# Altium PCB PCB拼板.pcbdoc
Units mm, origin at the board's own origin, x right, y up, seen from the top; angles counter-clockwise.
Board outline 84.6 x 89.96 mm, 2 copper layers (Top Layer, Bottom Layer); 62 components, 70 nets, 272 pads, 115 vias.
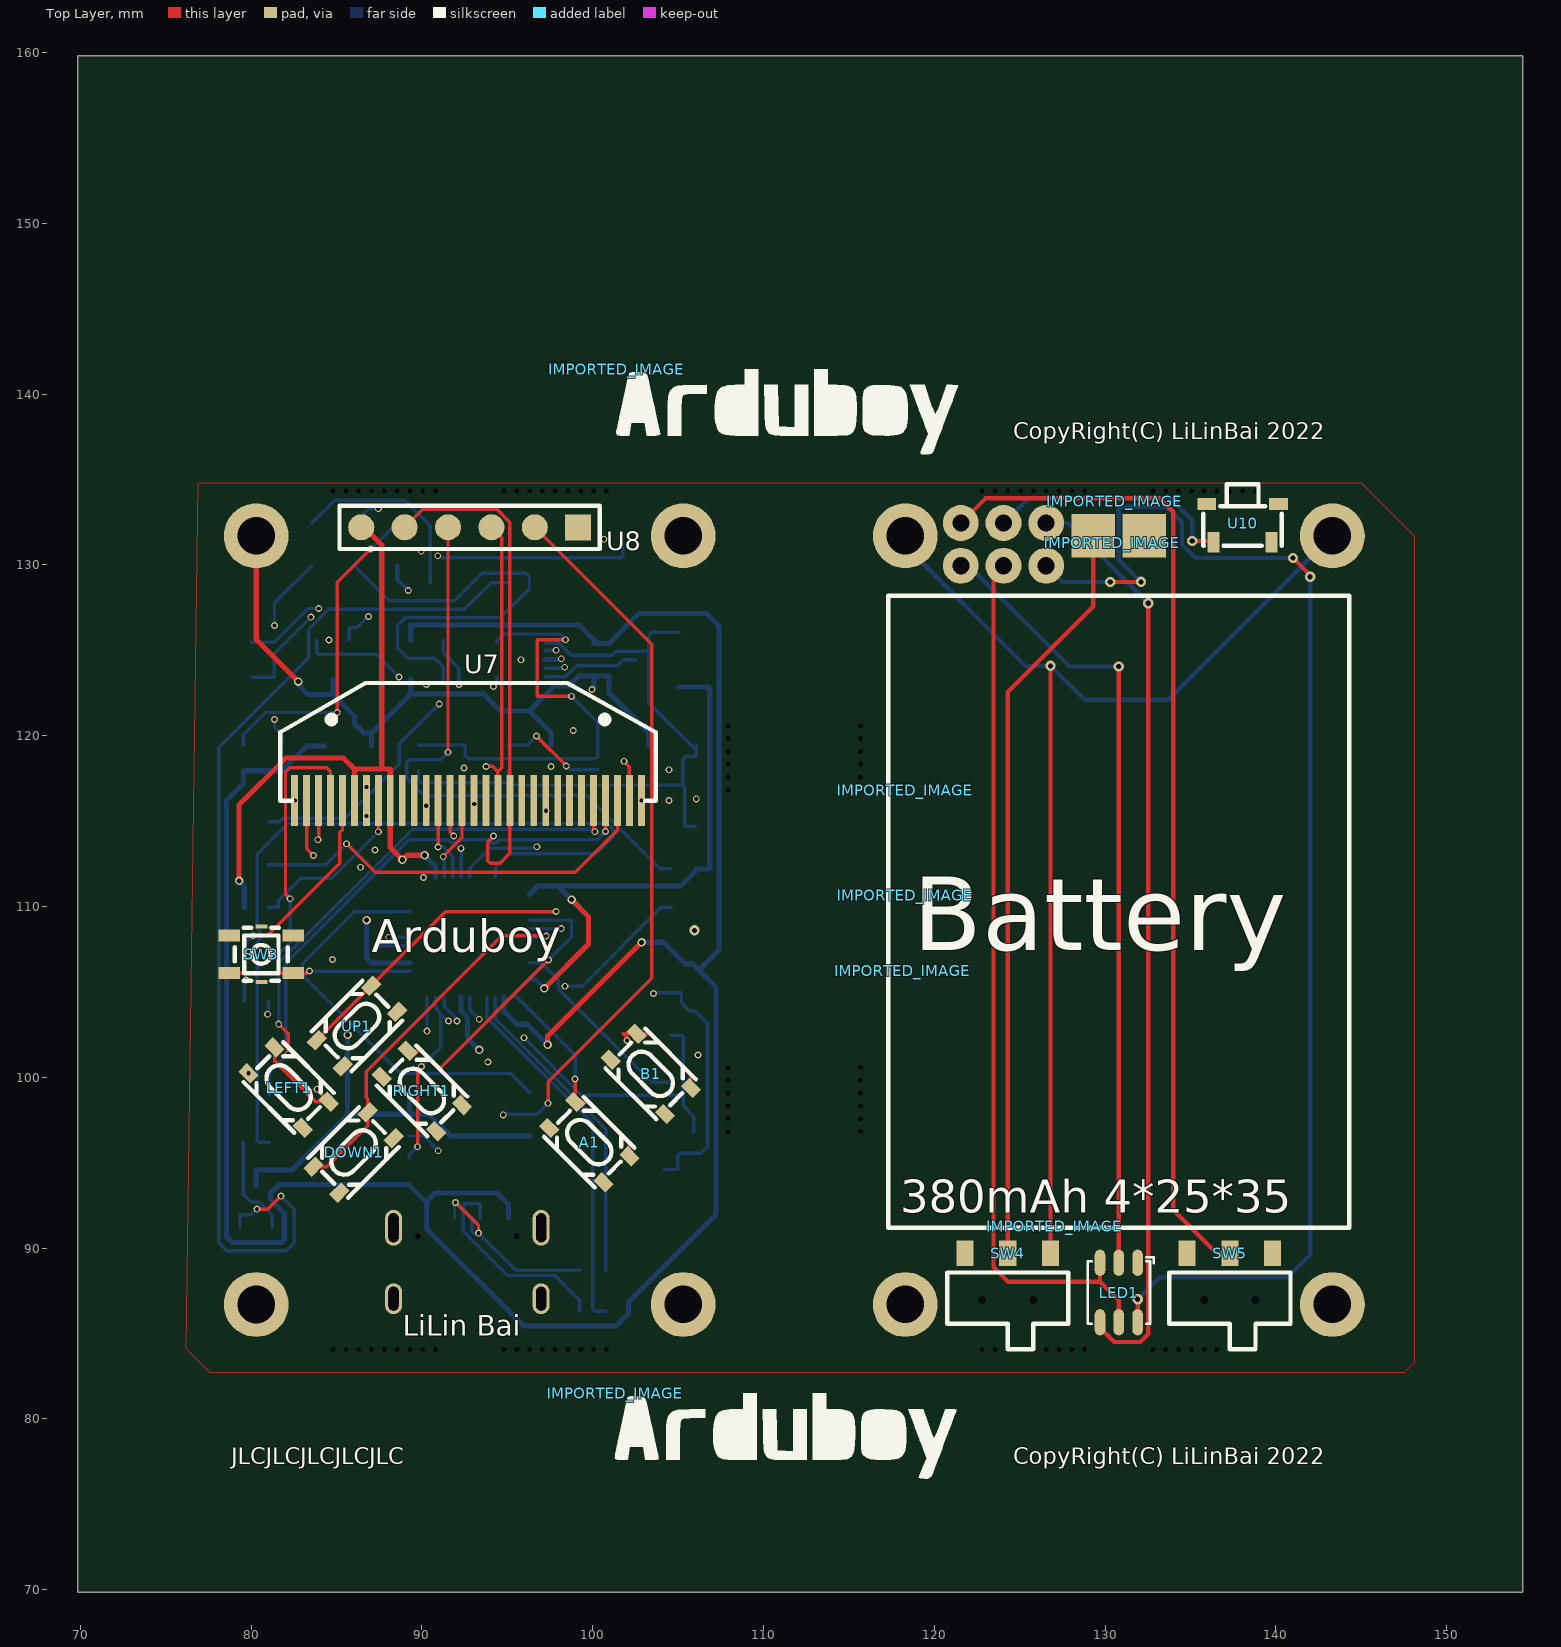
[diagram p0: Top Layer view]
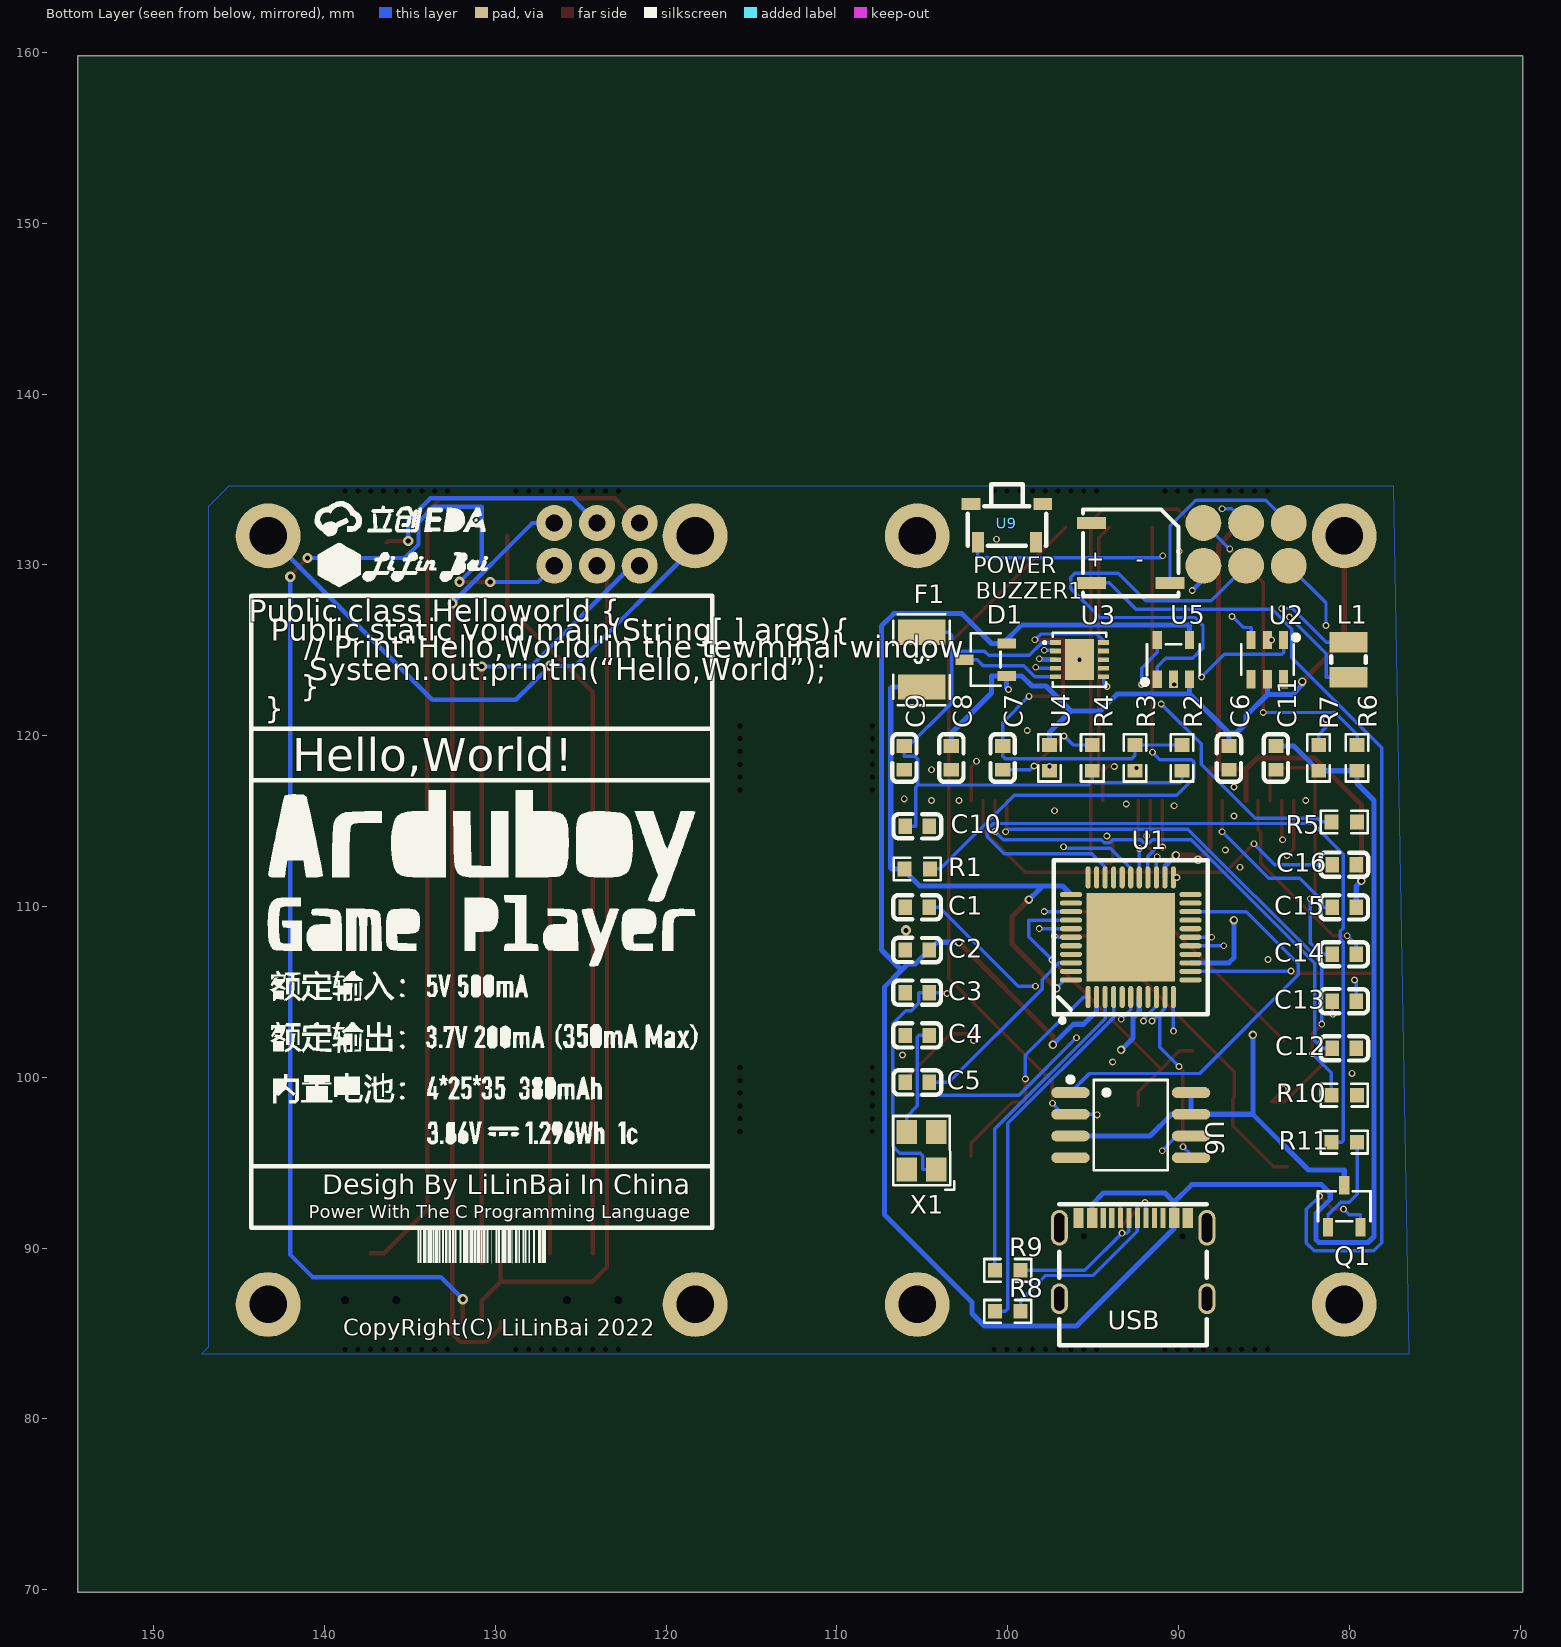
[diagram p1: Bottom Layer view, seen from below]

## Layer stack, top to bottom
Top Solder: solder mask 0.0102, Solder Resist, Dk 3.5
Top Layer: signal copper 0.0356
Dielectric 1: dielectric 0.32, FR-4, Dk 4.8
Bottom Layer: signal copper 0.0356
Bottom Solder: solder mask 0.0102, Solder Resist, Dk 3.5

## Board outline
154.45,69.85 69.85,69.85 69.85,159.808 154.45,159.808
cut-out: 84.937,134.325 ccw(c84.8,134.325) 84.662,134.325 ccw(c84.8,134.325)
cut-out: 85.688,134.325 ccw(c85.55,134.325) 85.413,134.325 ccw(c85.55,134.325)
cut-out: 86.438,134.325 ccw(c86.3,134.325) 86.163,134.325 ccw(c86.3,134.325)
cut-out: 87.187,134.325 ccw(c87.05,134.325) 86.912,134.325 ccw(c87.05,134.325)
cut-out: 87.937,134.325 ccw(c87.8,134.325) 87.662,134.325 ccw(c87.8,134.325)
cut-out: 88.688,134.325 ccw(c88.55,134.325) 88.413,134.325 ccw(c88.55,134.325)
cut-out: 89.438,134.325 ccw(c89.3,134.325) 89.163,134.325 ccw(c89.3,134.325)
cut-out: 90.187,134.325 ccw(c90.05,134.325) 89.912,134.325 ccw(c90.05,134.325)
cut-out: 90.937,134.325 ccw(c90.8,134.325) 90.662,134.325 ccw(c90.8,134.325)
cut-out: 94.937,134.325 ccw(c94.8,134.325) 94.662,134.325 ccw(c94.8,134.325)
cut-out: 95.688,134.325 ccw(c95.55,134.325) 95.413,134.325 ccw(c95.55,134.325)
cut-out: 96.438,134.325 ccw(c96.3,134.325) 96.163,134.325 ccw(c96.3,134.325)
cut-out: 97.187,134.325 ccw(c97.05,134.325) 96.912,134.325 ccw(c97.05,134.325)
cut-out: 97.937,134.325 ccw(c97.8,134.325) 97.662,134.325 ccw(c97.8,134.325)
cut-out: 98.688,134.325 ccw(c98.55,134.325) 98.413,134.325 ccw(c98.55,134.325)
cut-out: 99.438,134.325 ccw(c99.3,134.325) 99.163,134.325 ccw(c99.3,134.325)
cut-out: 100.187,134.325 ccw(c100.05,134.325) 99.912,134.325 ccw(c100.05,134.325)
cut-out: 100.937,134.325 ccw(c100.8,134.325) 100.662,134.325 ccw(c100.8,134.325)
cut-out: 122.937,134.325 ccw(c122.8,134.325) 122.662,134.325 ccw(c122.8,134.325)
cut-out: 123.687,134.325 ccw(c123.55,134.325) 123.412,134.325 ccw(c123.55,134.325)
cut-out: 124.438,134.325 ccw(c124.3,134.325) 124.163,134.325 ccw(c124.3,134.325)
cut-out: 125.188,134.325 ccw(c125.05,134.325) 124.913,134.325 ccw(c125.05,134.325)
cut-out: 125.937,134.325 ccw(c125.8,134.325) 125.662,134.325 ccw(c125.8,134.325)
cut-out: 126.687,134.325 ccw(c126.55,134.325) 126.412,134.325 ccw(c126.55,134.325)
cut-out: 127.438,134.325 ccw(c127.3,134.325) 127.163,134.325 ccw(c127.3,134.325)
cut-out: 128.188,134.325 ccw(c128.05,134.325) 127.913,134.325 ccw(c128.05,134.325)
cut-out: 128.937,134.325 ccw(c128.8,134.325) 128.662,134.325 ccw(c128.8,134.325)
cut-out: 132.937,134.325 ccw(c132.8,134.325) 132.662,134.325 ccw(c132.8,134.325)
cut-out: 133.687,134.325 ccw(c133.55,134.325) 133.412,134.325 ccw(c133.55,134.325)
cut-out: 134.438,134.325 ccw(c134.3,134.325) 134.163,134.325 ccw(c134.3,134.325)
cut-out: 135.188,134.325 ccw(c135.05,134.325) 134.913,134.325 ccw(c135.05,134.325)
cut-out: 135.938,134.325 ccw(c135.8,134.325) 135.663,134.325 ccw(c135.8,134.325)
cut-out: 136.687,134.325 ccw(c136.55,134.325) 136.412,134.325 ccw(c136.55,134.325)
cut-out: 137.438,134.325 ccw(c137.3,134.325) 137.163,134.325 ccw(c137.3,134.325)
cut-out: 138.188,134.325 ccw(c138.05,134.325) 137.913,134.325 ccw(c138.05,134.325)
cut-out: 138.938,134.325 ccw(c138.8,134.325) 138.663,134.325 ccw(c138.8,134.325)
cut-out: 84.937,84.075 ccw(c84.8,84.075) 84.662,84.075 ccw(c84.8,84.075)
cut-out: 85.688,84.075 ccw(c85.55,84.075) 85.413,84.075 ccw(c85.55,84.075)
cut-out: 86.438,84.075 ccw(c86.3,84.075) 86.163,84.075 ccw(c86.3,84.075)
cut-out: 87.187,84.075 ccw(c87.05,84.075) 86.912,84.075 ccw(c87.05,84.075)
cut-out: 87.937,84.075 ccw(c87.8,84.075) 87.662,84.075 ccw(c87.8,84.075)
cut-out: 88.688,84.075 ccw(c88.55,84.075) 88.413,84.075 ccw(c88.55,84.075)
cut-out: 89.438,84.075 ccw(c89.3,84.075) 89.163,84.075 ccw(c89.3,84.075)
cut-out: 90.187,84.075 ccw(c90.05,84.075) 89.912,84.075 ccw(c90.05,84.075)
cut-out: 90.937,84.075 ccw(c90.8,84.075) 90.662,84.075 ccw(c90.8,84.075)
cut-out: 94.937,84.075 ccw(c94.8,84.075) 94.662,84.075 ccw(c94.8,84.075)
cut-out: 95.688,84.075 ccw(c95.55,84.075) 95.413,84.075 ccw(c95.55,84.075)
cut-out: 96.438,84.075 ccw(c96.3,84.075) 96.163,84.075 ccw(c96.3,84.075)
cut-out: 97.187,84.075 ccw(c97.05,84.075) 96.912,84.075 ccw(c97.05,84.075)
cut-out: 97.937,84.075 ccw(c97.8,84.075) 97.662,84.075 ccw(c97.8,84.075)
cut-out: 98.688,84.075 ccw(c98.55,84.075) 98.413,84.075 ccw(c98.55,84.075)
cut-out: 99.438,84.075 ccw(c99.3,84.075) 99.163,84.075 ccw(c99.3,84.075)
cut-out: 100.187,84.075 ccw(c100.05,84.075) 99.912,84.075 ccw(c100.05,84.075)
cut-out: 100.937,84.075 ccw(c100.8,84.075) 100.662,84.075 ccw(c100.8,84.075)
cut-out: 122.937,84.075 ccw(c122.8,84.075) 122.662,84.075 ccw(c122.8,84.075)
cut-out: 123.687,84.075 ccw(c123.55,84.075) 123.412,84.075 ccw(c123.55,84.075)
cut-out: 124.438,84.075 ccw(c124.3,84.075) 124.163,84.075 ccw(c124.3,84.075)
cut-out: 125.188,84.075 ccw(c125.05,84.075) 124.913,84.075 ccw(c125.05,84.075)
cut-out: 125.937,84.075 ccw(c125.8,84.075) 125.662,84.075 ccw(c125.8,84.075)
cut-out: 126.687,84.075 ccw(c126.55,84.075) 126.412,84.075 ccw(c126.55,84.075)
cut-out: 127.438,84.075 ccw(c127.3,84.075) 127.163,84.075 ccw(c127.3,84.075)
cut-out: 128.188,84.075 ccw(c128.05,84.075) 127.913,84.075 ccw(c128.05,84.075)
cut-out: 128.937,84.075 ccw(c128.8,84.075) 128.662,84.075 ccw(c128.8,84.075)
cut-out: 132.937,84.075 ccw(c132.8,84.075) 132.662,84.075 ccw(c132.8,84.075)
cut-out: 133.687,84.075 ccw(c133.55,84.075) 133.412,84.075 ccw(c133.55,84.075)
cut-out: 134.438,84.075 ccw(c134.3,84.075) 134.163,84.075 ccw(c134.3,84.075)
cut-out: 135.188,84.075 ccw(c135.05,84.075) 134.913,84.075 ccw(c135.05,84.075)
cut-out: 135.937,84.075 ccw(c135.8,84.075) 135.662,84.075 ccw(c135.8,84.075)
cut-out: 136.687,84.075 ccw(c136.55,84.075) 136.412,84.075 ccw(c136.55,84.075)
cut-out: 137.438,84.075 ccw(c137.3,84.075) 137.163,84.075 ccw(c137.3,84.075)
cut-out: 138.188,84.075 ccw(c138.05,84.075) 137.913,84.075 ccw(c138.05,84.075)
cut-out: 138.937,84.075 ccw(c138.8,84.075) 138.662,84.075 ccw(c138.8,84.075)
cut-out: 108.062,120.575 ccw(c107.925,120.575) 107.787,120.575 ccw(c107.925,120.575)
cut-out: 108.062,119.825 ccw(c107.925,119.825) 107.787,119.825 ccw(c107.925,119.825)
cut-out: 108.062,119.075 ccw(c107.925,119.075) 107.787,119.075 ccw(c107.925,119.075)
cut-out: 108.062,118.325 ccw(c107.925,118.325) 107.787,118.325 ccw(c107.925,118.325)
cut-out: 108.062,117.575 ccw(c107.925,117.575) 107.787,117.575 ccw(c107.925,117.575)
cut-out: 108.062,116.825 ccw(c107.925,116.825) 107.787,116.825 ccw(c107.925,116.825)
cut-out: 115.812,116.825 ccw(c115.675,116.825) 115.537,116.825 ccw(c115.675,116.825)
cut-out: 115.812,117.575 ccw(c115.675,117.575) 115.537,117.575 ccw(c115.675,117.575)
cut-out: 115.812,118.325 ccw(c115.675,118.325) 115.537,118.325 ccw(c115.675,118.325)
cut-out: 115.812,119.075 ccw(c115.675,119.075) 115.537,119.075 ccw(c115.675,119.075)
cut-out: 115.812,119.825 ccw(c115.675,119.825) 115.537,119.825 ccw(c115.675,119.825)
cut-out: 115.812,120.575 ccw(c115.675,120.575) 115.537,120.575 ccw(c115.675,120.575)
cut-out: 108.062,96.825 ccw(c107.925,96.825) 107.787,96.825 ccw(c107.925,96.825)
cut-out: 108.062,97.575 ccw(c107.925,97.575) 107.787,97.575 ccw(c107.925,97.575)
cut-out: 108.062,98.325 ccw(c107.925,98.325) 107.787,98.325 ccw(c107.925,98.325)
cut-out: 108.062,99.075 ccw(c107.925,99.075) 107.787,99.075 ccw(c107.925,99.075)
cut-out: 108.062,99.825 ccw(c107.925,99.825) 107.787,99.825 ccw(c107.925,99.825)
cut-out: 108.062,100.575 ccw(c107.925,100.575) 107.787,100.575 ccw(c107.925,100.575)
cut-out: 115.812,96.825 ccw(c115.675,96.825) 115.537,96.825 ccw(c115.675,96.825)
cut-out: 115.812,97.575 ccw(c115.675,97.575) 115.537,97.575 ccw(c115.675,97.575)
cut-out: 115.812,98.325 ccw(c115.675,98.325) 115.537,98.325 ccw(c115.675,98.325)
cut-out: 115.812,99.075 ccw(c115.675,99.075) 115.537,99.075 ccw(c115.675,99.075)
cut-out: 115.812,99.825 ccw(c115.675,99.825) 115.537,99.825 ccw(c115.675,99.825)
cut-out: 115.812,100.575 ccw(c115.675,100.575) 115.537,100.575 ccw(c115.675,100.575)

## Components (designator, comment, footprint, x,y, rotation, side; value= is the part's Value field where it differs from the comment)
A1 "PTS815SJG250SMTRLFS" SW-SMD_4P-L4.2-W3.2-P2.15-LS4.6-1 99.8,96.2 r315 top
B1 "PTS815SJG250SMTRLFS" SW-SMD_4P-L4.2-W3.2-P2.15-LS4.6-1 103.4,100.2 r315 top
BUZZER1 "YS-SBZ5025C03R12" BUZ-SMD_L5.0-W5.5-P4.60 92.8,130.7 r180 bottom
C1 "1uF" C0603 105.3,109.95 r180 bottom
C2 "1uF" C0603 105.3,107.45 r180 bottom
C3 "22pF" C0603 105.3,104.95 r180 bottom
C4 "22pF" C0603 105.3,102.45 r180 bottom
C5 "0.1uF" C0603 105.3,99.7 r0 bottom
C6 "100nF" C0603 87.05,118.7 r90 bottom
C7 "68pF" C0603 100.3,118.7 r90 bottom
C8 "10uF" C0603 103.3,118.7 r90 bottom
C9 "22uF" C0603 106.05,118.7 r90 bottom
C10 "22uF" C0603 105.3,114.7 r0 bottom
C11 "1uF" C0603 84.3,118.7 r90 bottom
C12 "4.7uF" C0603 80.3,101.7 r0 bottom
C13 "1uF" C0603 80.3,104.45 r180 bottom
C14 "1uF" C0603 80.3,107.2 r180 bottom
C15 "2.2uF" C0603 80.3,109.95 r180 bottom
C16 "2.2uF" C0603 80.3,112.45 r0 bottom
D1 "BAT54C" SOT-23-3_L2.9-W1.6-P1.90-LS2.8-BR 101.3,124.45 r180 bottom
DOWN1 "PTS815SJG250SMTRLFS" SW-SMD_4P-L4.2-W3.2-P2.15-LS4.6-1 86,95.6 r45 top
F1 "ASMD1210-150" F1210 105.05,124.45 r270 bottom
IMPORTED_IMAGE "IMPORTED_IMAGE" IMPORTED_IMAGE 118.164,106.236 r0 top
IMPORTED_IMAGE "IMPORTED_IMAGE" IMPORTED_IMAGE 118.302,110.652 r0 top
IMPORTED_IMAGE "IMPORTED_IMAGE" IMPORTED_IMAGE 118.302,116.797 r0 top
IMPORTED_IMAGE "IMPORTED_IMAGE" IMPORTED_IMAGE 130.418,131.283 r0 top
IMPORTED_IMAGE "IMPORTED_IMAGE" IMPORTED_IMAGE 130.566,133.731 r0 top
IMPORTED_IMAGE "IMPORTED_IMAGE" IMPORTED_IMAGE 127.051,91.269 r0 top
IMPORTED_IMAGE "IMPORTED_IMAGE" IMPORTED_IMAGE 101.405,141.466 r0 top
IMPORTED_IMAGE "IMPORTED_IMAGE" IMPORTED_IMAGE 101.318,81.5 r0 top
L1 "3.3uH" IND-SMD_L2.5-W2.0 80.05,124.45 r270 bottom
LED1 "TC3838RGBE07-3CJH-E19" LED-SMD_6P-L3.5-W3.5-BL 130.8,87.4 r180 top
LEFT1 "PTS815SJG250SMTRLFS" SW-SMD_4P-L4.2-W3.2-P2.15-LS4.6-1 82.2,99.4 r315 top
Q1 "MMSS8050-H-TP" SOT-23-3_L2.9-W1.6-P1.90-LS2.8-BR 80.3,92.45 r270 bottom
R1 "10K" R0603 105.3,112.2 r180 bottom
R2 "820kΩ" R0603 89.8,118.7 r90 bottom
R3 "143kΩ" R0603 92.55,118.7 r270 bottom
R4 "750K" R0603 95.05,118.7 r90 bottom
R5 "3kΩ" R0603 80.3,114.95 r0 bottom
R6 "3kΩ" R0603 79.55,118.7 r270 bottom
R7 "3kΩ" R0603 81.8,118.7 r270 bottom
R8 "22.6Ω" R0603 100,86.3 r180 bottom
R9 "22.6Ω" R0603 100,88.7 r180 bottom
R10 "910kΩ" R0603 80.3,98.95 r0 bottom
R11 "3.3kΩ" R0603 80.3,96.2 r180 bottom
RIGHT1 "PTS815SJG250SMTRLFS" SW-SMD_4P-L4.2-W3.2-P2.15-LS4.6-1 90,99.2 r315 top
SW3 "K2-1177SW-A4SW" KEY-SMD_K2-1177SW-A4DW-06 80.6,107.2 r0 top
SW4 "SK-3390A-L1" SW-SMD_SK-3390A-L1 124.3,89.7 r0 top
SW5 "SK-3390A-L1" SW-SMD_SK-3390A-L1 137.3,89.7 r0 top
U1 "ATMEGA32U4-MU" VQFN-44_L7.0-W7.0-P0.50-BL-EP5.2 92.8,108.2 r180 bottom
U2 "EC190707-14D8-17FE" SOT-23-6_L2.9-W1.6-P0.95-LS2.8-BL 84.8,124.45 r0 bottom
U3 "MP2155" TDFN-10_L3.0-W3.0-P0.50-TL-EP 95.8,124.45 r180 bottom
U4 "0R" R0603 97.55,118.7 r90 bottom
U5 "LTC4054ES5-4.2#TRPBF" TSOT-23-5_L2.9-W1.6-P0.95-LS2.8-BL 90.3,124.45 r180 bottom
U6 "W25Q128JVSIQ" SOIC-8_L5.3-W5.3-P1.27-LS8.0-BL 92.8,97.2 r270 bottom
U7 "0.96-OLED-30Pin_JX" SSD1306-30PIN_JX 82.55,116.2 r0 top
U8 "ISP 06" "ISP 06" 92.8,132.2 r0 top
U9 "SW-SMD_ST-1100LP" SW-SMD_ST-1100LP 100.05,132.45 r270 bottom
U10 "SW-SMD_ST-1100LP" SW-SMD_ST-1100LP 138.05,132.45 r270 top
UP1 "PTS815SJG250SMTRLFS" SW-SMD_4P-L4.2-W3.2-P2.15-LS4.6-1 86.2,103 r45 top
USB "TYPE-C 16P(073)" USB-C-SMD_TYPE-C16PIN_C668624 92.66,89.402 r180 bottom
X1 "16MHz" OSC-SMD_4P-L3.2-W2.5-BL 105.05,95.7 r90 bottom

## Footprints (in the part's own frame and the unit in brackets; to place one, negate y for a bottom-side part, rotate by r counter-clockwise, add the part's x,y. Pads: shape width x height; smd on the part's side, far side on the other; paste and mask are expansions set on the pad)
BUZ-SMD_L5.0-W5.5-P4.60 [mm]
  rect 1.7x0.7 smd: 1(-2.3,-1.75) 2(2.3,-1.75) 3(-2.3,1.75)
  silkscreen extent -2.79,-2.54 2.79,2.54
C0603 [mm]
  rect 0.8x0.9 smd: 1(-0.7,0) 2(0.7,0)
  silkscreen extent -1.41,-0.71 1.39,0.72
F1210 [mm]
  rect 1.485x2.781 smd: 1(-1.6,0) 2(1.6,0)
  silkscreen extent -2.67,-1.65 2.67,1.65
IMPORTED_IMAGE [mm]
IND-SMD_L2.5-W2.0 [mm]
  rect 1.2x2.2 smd: 1(1.028,0) 2(-1.028,0)
  silkscreen extent -0.2,-1.02 0.2,1.02
"ISP 06" [mil]
  round 60 smd: 1(-250,0.01) 2(-150,0.01) 3(-50,0.01) 4(50,0.01) 5(150,0.01)
  rect 60x60 smd: 6(250,0)
  silkscreen extent -300,-50 300,50
KEY-SMD_K2-1177SW-A4DW-06 [mm]
  rect 1.25x0.7 smd: 1(-1.875,1.101) 2(1.875,1.101) 3(-1.875,-1.1) 4(1.875,-1.1)
  rect 0.7x0.25 smd: 5(0,1.625) 6(0,-1.625)
  silkscreen extent -1.55,-1.55 1.55,1.55
LED-SMD_6P-L3.5-W3.5-BL [mm]
  oval 0.616x1.533 smd: 1(1.1,1.742) 2(0,1.742) 3(-1.1,1.742) 4(-1.1,-1.741) 5(0,-1.741) 6(1.1,-1.741)
  silkscreen extent -2.05,-2.05 1.83,1.83
OSC-SMD_4P-L3.2-W2.5-BL [mm]
  rect 1.4x1.2 smd: 1(-1.1,-0.875) 2(1.1,-0.875) 3(1.1,0.875) 4(-1.1,0.875)
  silkscreen extent -2.29,-1.9 2.03,1.65
R0603 [mm]
  rect 0.806x0.864 smd: 1(-0.753,0) 2(0.753,0)
  silkscreen extent -1.39,-0.66 1.39,0.66
SOIC-8_L5.3-W5.3-P1.27-LS8.0-BL [mm]
  oval 0.63x2.25 smd: 1(-1.905,-3.53) 2(-0.635,-3.53) 3(0.635,-3.53) 4(1.905,-3.53) 5(1.905,3.53) 6(0.635,3.53) 7(-0.635,3.53) 8(-1.905,3.53)
  silkscreen extent -2.82,-3.68 2.64,2.18
SOT-23-3_L2.9-W1.6-P1.90-LS2.8-BR [mm]
  rect 1.07x0.6 smd: 1(1.235,-0.95) 2(1.235,0.95) 3(-1.235,0)
  silkscreen extent -0.88,-1.54 0.88,1.54
SOT-23-6_L2.9-W1.6-P0.95-LS2.8-BL [mm]
  rect 0.532x1.072 smd: 1(-0.95,-1.149) 2(0,-1.149) 3(0.95,-1.149) 4(0.95,1.149) 5(0,1.149) 6(-0.95,1.149)
  silkscreen extent -1.82,-1.45 1.54,0.89
SSD1306-30PIN_JX [mm]
  rect 0.4x3 smd: 1(0,0) 2(0.7,0) 3(1.4,0) 4(2.1,0) 5(2.8,0) 6(3.5,0) 7(4.2,0) 8(4.9,0) 9(5.6,0) 10(6.3,0) 11(7,0) 12(7.7,0) 13(8.4,0) 14(9.1,0) 15(9.8,0) 16(10.5,0) 17(11.2,0) 18(11.9,0) 19(12.6,0) 20(13.3,0) 21(14,0) 22(14.7,0) 23(15.4,0) 24(16.1,0) 25(16.8,0) 26(17.5,0) 27(18.2,0) 28(18.9,0) 29(19.6,0) 30(20.3,0)
  silkscreen extent -0.85,0 21.15,6.89
SW-SMD_4P-L4.2-W3.2-P2.15-LS4.6-1 [mm]
  rect 1x0.7 smd: 1(-2.25,1.075) 2(2.25,1.075) 3(-2.25,-1.075) 4(2.25,-1.075)
  silkscreen extent -2.1,-1.65 2.1,1.65
SW-SMD_SK-3390A-L1 [mm]
  rect 1x1.5 smd: 1(-2.5,0) 2(0,0) 3(2.5,0)
  Multi-Layer board cut-out: -1.275,-2.75 -1.297,-2.652 -1.36,-2.574 -1.45,-2.531 -1.55,-2.531 -1.64,-2.574 -1.703,-2.652 -1.725,-2.75 -1.725,-2.75 -1.703,-2.848 -1.64,-2.926 -1.55,-2.969 -1.45,-2.969 -1.36,-2.926 -1.297,-2.848 -1.275,-2.75
  Multi-Layer board cut-out: 1.725,-2.75 1.703,-2.652 1.64,-2.574 1.55,-2.531 1.45,-2.531 1.36,-2.574 1.297,-2.652 1.275,-2.75 1.275,-2.75 1.297,-2.848 1.36,-2.926 1.45,-2.969 1.55,-2.969 1.64,-2.926 1.703,-2.848 1.725,-2.75
  silkscreen extent -3.55,-5.63 3.55,-1.12
SW-SMD_ST-1100LP [mm]
  rect 1.2x0.7 smd: 1(1.125,1.7) 2(1.125,-1.7)
  rect 0.7x1.1 smd: 3(-1.125,-2.1) 4(-1.125,2.1)
  silkscreen extent -2.28,-2.3 1.32,2.3
TDFN-10_L3.0-W3.0-P0.50-TL-EP [mm]
  rect 0.665x0.28 smd: 1(-1.408,1) 2(-1.408,0.5) 3(-1.408,0) 4(-1.408,-0.5) 5(-1.408,-1) 6(1.407,-1) 7(1.407,-0.5) 8(1.407,0) 9(1.407,0.5) 10(1.407,1)
  rect 1.7x2.4 smd: 11(0,0)
  silkscreen extent -2.12,-1.58 1.58,1.58
TSOT-23-5_L2.9-W1.6-P0.95-LS2.8-BL [mm]
  rect 0.532x1.045 smd: 1(-0.95,-1.148) 2(0,-1.148) 3(0.95,-1.148) 4(0.95,1.147) 5(-0.95,1.147)
  silkscreen extent -1.82,-1.45 1.55,0.9
USB-C-SMD_TYPE-C16PIN_C668624 [mm]
  oval 1x2.1 hole 0.6 slot 1.7 at 90 deg: 1(-4.32,1.787) 2(4.32,1.787)
  oval 1x1.8 hole 0.6 slot 1.4 at 90 deg: 3(-4.32,-2.363) 4(4.32,-2.363)
  rect 0.6x1.15 smd: A1B12(-3.2,2.362) A4B9(-2.4,2.362) B1A12(3.2,2.362) B4A9(2.4,2.362)
  rect 0.3x1.15 smd: A5(-1.25,2.362) A6(-0.25,2.362) A7(0.25,2.362) A8(1.25,2.362) B5(1.75,2.362) B6(0.75,2.362) B7(-0.75,2.362) B8(-1.75,2.362)
  Multi-Layer board cut-out: 2.727,1.287 2.743,1.358 2.788,1.414 2.854,1.446 2.926,1.446 2.991,1.414 3.036,1.358 3.052,1.287 3.052,1.287 3.036,1.217 2.991,1.16 2.926,1.129 2.854,1.129 2.788,1.16 2.743,1.217 2.727,1.287
  Multi-Layer board cut-out: -3.053,1.287 -3.037,1.358 -2.992,1.414 -2.926,1.446 -2.854,1.446 -2.789,1.414 -2.744,1.358 -2.728,1.287 -2.728,1.287 -2.744,1.217 -2.789,1.16 -2.854,1.129 -2.926,1.129 -2.992,1.16 -3.037,1.217 -3.053,1.287
  silkscreen extent -4.32,-5.08 4.32,3.17
VQFN-44_L7.0-W7.0-P0.50-BL-EP5.2 [mm]
  oval 0.3x1.3 smd: 1(-2.5,-3.5) 2(-2,-3.5) 3(-1.5,-3.5) 4(-1,-3.5) 5(-0.5,-3.5) 6(0,-3.5) 7(0.5,-3.5) 8(1,-3.5) 9(1.5,-3.5) 10(2,-3.5) 11(2.5,-3.5) 23(2.5,3.5) 24(2,3.5) 25(1.5,3.5) 26(1,3.5) 27(0.5,3.5) 28(0,3.5) 29(-0.5,3.5) 30(-1,3.5) 31(-1.5,3.5) 32(-2,3.5) 33(-2.5,3.5)
  oval 1.3x0.3 smd: 12(3.5,-2.5) 13(3.5,-2) 14(3.5,-1.5) 15(3.5,-1) 16(3.5,-0.5) 17(3.5,0) 18(3.5,0.5) 19(3.5,1) 20(3.5,1.5) 21(3.5,2) 22(3.5,2.5) 34(-3.5,2.5) 35(-3.5,2) 36(-3.5,1.5) 37(-3.5,1) 38(-3.5,0.5) 39(-3.5,0) 40(-3.5,-0.5) 41(-3.5,-1) 42(-3.5,-1.5) 43(-3.5,-2) 44(-3.5,-2.5)
  rect 5.2x5.2 smd: 45(0,0)
  silkscreen extent -4.5,-5 4.5,4.5

## Free pads (board coordinates)
  round 3.8 hole 2.2 copper offset -0.001,0: 1(80.301,86.7) 1(80.301,131.7) 1(105.301,86.7) 1(105.301,131.7) 1(118.301,86.7) 1(118.301,131.7) 1(143.301,86.7) 1(143.301,131.7)
  rect 2.54x2.54 smd: 2(129.3,131.7) 2(132.3,131.7)
  round 2.1 smd far side: 3(83.55,129.95) 3(83.55,132.45) 3(86.05,129.95) 3(86.05,132.45) 3(88.55,129.95) 3(88.55,132.45)
  round 2.1 hole 1 copper offset 0,0: 3(121.55,129.95) 3(121.55,132.45) 3(124.05,132.45) 3(126.55,129.95) 3(126.55,132.45)
  round 2.1 hole 1: 3(124.05,129.95)

## Via types
v1: diameter 0.4, hole 0.25, Top Layer to Bottom Layer, 94 vias
v2: diameter 0.5, hole 0.3, Top Layer to Bottom Layer, 11 vias
v3: diameter 0.61, hole 0.305, Top Layer to Bottom Layer, 10 vias

## Nets (pads, with @x,y where several pads share a name; then routed paths per layer and width w, separated by ;. In a path a pad name is that pad's centre, name@x,y a point inside that pad or via, vN(x,y) a via of type N, cw(c..) or ccw(c..) an arc to the next point about the centre after c; other vN are vias at no path point)
BEEP: R11.1 U1.31 | length 48.1
  Bottom Layer w0.2: R11.1 80.449,96.2 80.35,96.3 80.35,107.943 80.526,108.119 80.526,108.54 80.35,108.716 80.35,113.064 82.146,114.86 100.855,114.86 101.204,114.511 101.204,114.084 100.212,113.091 95.087,113.091 94.3,112.304 U1.31
BEEP-: BUZZER1.2 pad.3@83.55,132.45 pad.3@121.55,132.45 SW5.2 | length 70.1
  Top Layer w0.254: pad.3@121.55,132.45 122.994,133.894 133.204,133.894 133.993,133.105 133.993,92.227 136.52,89.7 SW5.2
  Bottom Layer w0.2: pad.3@83.55,132.45 84.888,133.788 89.005,133.788 90.5,132.293 BUZZER1.2
BT+: pad.2@129.3,131.7 SW4.2 | length 44.1
  Top Layer w0.254: SW4.2 124.3,122.559 129.3,127.559 pad.2@129.3,131.7
BUZZER1_1: BUZZER1.1 Q1.2 | length 62.4
  Top Layer w0.2: v1(80.343,92.281) 80.983,92.281 v1(81.745,93.042)
  Bottom Layer w0.2: Q1.2 79.35,91.951 80.012,91.951 v1(80.343,92.281) ; v1(81.745,93.042) 82.522,92.265 82.522,90.3 82.06,89.837 78.572,89.837 78.104,90.305 78.104,119.295 83.371,124.562 83.371,126.242 84.521,127.391 92.491,127.391 94.049,128.95 BUZZER1.1
BUZZER1_3: BUZZER1.3
GND: A1.3 A1.4 B1.3 B1.4 C1.1 C2.1 C3.1 C4.1 C5.2 C6.1 C8.1 C9.1 C10.1 C11.1 C12.1 C16.1 DOWN1.3 DOWN1.4 LED1.4 LEFT1.3 LEFT1.4 pad.1@105.301,86.7 pad.1@118.301,86.7 pad.1@143.301,86.7 pad.2@132.3,131.7 R3.2 R5.1 R10.1 RIGHT1.3 RIGHT1.4 SW3.1 SW3.2 SW5.3 U1.5 U1.15 U1.23 U1.33 U1.35 U1.43 U1.45 U2.2 U3.8 U3.9 U3.11 U4.1 U5.2 U6.4 U7.1 U7.7 U7.10 U7.11 U7.12 U7.16 U7.17 U7.21 U7.22 U7.23 U7.24 U7.25 U7.30 U8.6 U9.1 U10.1 UP1.3 UP1.4 USB.1 USB.2 USB.3 USB.4 USB.A1B12 USB.B1A12
  other v1: 79.849,100.231 93.86,100.902 106.16,101.302 84.76,106.902 90.1,111.7 86.4,112.3 87.26,113.302 86.76,115.302 97.26,115.602 90.26,115.902 93.06,116.002 82.55,116.2 102.85,116.2 104.46,116.202 106.06,116.302 86.76,117.002 104.46,118.002 92.46,118.102 97.56,118.202 98.86,120.302 90.26,123.002 95.8,124.45 84.56,125.602 89.96,130.802 100.66,131.502
  other v3: 105.96,108.602
KEYA: A1.1 A1.2 U1.1 | length 12.8
  Top Layer w0.2: v1(98.969,99.901) A1.1 99.067,98.551 99.748,98.551 102.151,96.148 A1.2
  Bottom Layer w0.2: U1.1 95.563,104.7 98.969,101.294 v1(98.969,99.901)
KEYB: B1.1 B1.2 U1.28 | length 24.7
  Top Layer w0.2: v1@102.008,102.156 102.008,102.334 101.79,102.551 102.569,102.551 102.958,102.551 103.348,102.551 105.751,100.148 B1.2
  Mid-Layer 1 w0.2: v1(96.731,113.493) 102.007,108.217 v1@102.007,102.156
  Bottom Layer w0.2: U1.28@92.8,111.7 92.8,112.233 93.987,113.42 96.658,113.42 v1(96.731,113.493)
  other v1: 102.008,102.156
KEYDOWN: DOWN1.1 DOWN1.2 U1.39 | length 22.2
  Top Layer w0.2: DOWN1.1 84.427,94.769 86.831,97.173 DOWN1.2 86.831,98.73 86.735,98.826 86.735,100.332 94.679,108.276 v1(97.282,108.276)
  Bottom Layer w0.2: U1.39 97.207,108.2 v1(97.282,108.276)
KEYLEFT: LEFT1.1 LEFT1.2 U1.38 | length 45
  Top Layer w0.2: LEFT1.1@81.369,101.751 81.369,100.972 83.772,98.569 84.162,98.569 LEFT1.2 83.86,99.26 v1(83.86,99.302)
  Mid-Layer 2 w0.2: v1(83.86,99.302) 89.26,93.902 95.46,93.902 104.86,103.302 104.86,105.102 101.26,108.702 v1(98.16,108.702)
  Bottom Layer w0.2: U1.38 v1@98.159,108.703
KEYPOWER: pad.3@86.05,132.45 pad.3@124.05,132.45 U2.3 U9.2 U10.2 | length 41.4
  Top Layer w0.254: v3(135.1,131.4) 136.275,131.4 U10.2
  Mid-Layer 1 w0.2: v1(86.87,126.983) 87.45,127.563 v1(87.45,133.283) 88.177,133.283 v1(90.924,130.536)
  Bottom Layer w0.2: U2.3@85.75,125.599 85.75,126.336 86.222,126.336 v1(86.87,126.983) ; pad.3@86.05,132.45 86.883,133.283 v1(87.45,133.283) ; v1(90.924,130.536) 91.038,130.422 101.647,130.422 101.75,130.524 U9.2
  Bottom Layer w0.254: pad.3@124.051,132.451 125.494,133.894 133.807,133.894 135.1,132.601 v3(135.1,131.4)
KEYRESET: R1.2 SW3.3 SW3.4 U1.13 U8.3 | length 61.2
  Top Layer w0.2: SW3.3 79.551,106.1 81.649,106.1 SW3.4 83.3,106.1 v1(83.418,106.218) ; v1(91.53,119.027) U8.3
  Mid-Layer 1 w0.2: v1(83.418,106.218) 83.418,110.915 v1(91.53,119.027)
  Bottom Layer w0.2: v1(83.418,106.218) 83.436,106.2 U1.13 ; v1(91.53,119.027) 91.096,118.593 89.224,118.593 89.12,118.488 89.12,117.505 90.102,116.523 99.62,116.523 103.943,112.2 R1.2
KEYRIGHT: RIGHT1.1 RIGHT1.2 U1.37 | length 19.3
  Top Layer w0.2: RIGHT1.1 89.948,101.551 91.02,100.479 ; RIGHT1.2 92.351,99.148 91.02,100.479 ; v1(97.407,106.865) 91.02,100.479
  Bottom Layer w0.2: U1.37 98.761,109.201 98.761,108.22 v1(97.407,106.865)
KEYUP: U1.36 UP1.1 UP1.2 | length 18.7
  Top Layer w0.2: UP1.1 UP1.2 91.382,109.702 v1(97.86,109.702)
  Bottom Layer w0.2: U1.36 96.98,109.7 96.982,109.702 v1(97.86,109.702)
LEDB+: LED1.3 pad.3@88.55,129.95 pad.3@126.55,129.95 U2.1 U3.6 | length 96.4
  Top Layer w0.254: v3(130.299,128.999) v3(132.1,129) ; LED1.3 v3(131.9,87) ; v3(141,130.4) 142,129.4 v3(142,129.3)
  Mid-Layer 1 w0.2: v1(88.656,123.442) 93.622,123.442 v1(94.187,122.877)
  Mid-Layer 2 w0.254: v1(88.656,123.442) 89.2,123.986 v1(89.2,128.5)
  Bottom Layer w0.2: U2.1@83.85,125.599 83.85,124.862 83.95,124.762 87.336,124.762 v1(88.656,123.442) ; v1(94.187,122.877) 94.392,123.083 U3.6
  Bottom Layer w0.254: pad.3@88.55,129.95 88.55,129.15 v1(89.2,128.5) ; pad.3@126.55,129.949 127.5,128.999 v3(130.299,128.999) ; v3(131.9,87) 133.2,88.301 140.701,88.301 142.001,89.601 v3(142,129.3) ; v3(132.1,129) 130.8,130.3 130.8,133.4 133.6,133.4 134.5,132.5 134.5,131.2 135.3,130.4 v3(141,130.4)
LEDG+: LED1.1 pad.3@88.55,132.45 pad.3@126.55,132.45 R6.1 | length 73.6
  Top Layer w0.2: v1(85.042,121.359) 85.042,128.979 v1(87.001,130.938)
  Top Layer w0.254: LED1.1 129.7,85.338 130.532,84.506 132.059,84.506 132.528,84.975 v3(132.528,127.752)
  Bottom Layer w0.2: R6.1 79.55,120.057 80.852,121.359 v1(85.042,121.359) ; v1(87.001,130.938) 87.038,130.938 pad.3@88.55,132.45
  Bottom Layer w0.254: pad.3@126.55,132.45 127.83,132.45 v3(132.528,127.752)
LEDG-: LED1.2 LED1.6 pad.3@86.05,129.95 pad.3@124.05,129.95 U5.1 | length 78.1
  Top Layer w0.254: pad.3@124.05,129.95 123.465,129.365 123.465,88.888 124.319,88.034 129.7,88.034 ; LED1.6 129.7,88.034 ; LED1.2 130.8,86.934 129.7,88.034
  Bottom Layer w0.2: pad.3@86.05,129.949 88.1,127.899 91.92,127.899 93.523,129.502 96.08,129.502 96.301,129.281 96.301,128.618 94.605,126.921 89.05,126.921 88.57,126.441 88.57,125.148 89.182,124.536 90.739,124.536 91.249,124.026 U5.1
LEDR-: LED1.5 pad.3@83.55,129.95 pad.3@121.55,129.95 R7.1 | length 58.2
  Top Layer w0.254: LED1.5 v3(130.8,124.051)
  Mid-Layer 1 w0.2: v1(81.37,120.942) v1(81.37,126.454)
  Bottom Layer w0.2: v1(81.37,120.942) 81.37,120.487 81.8,120.057 R7.1 ; v1(81.37,126.454) 81.37,127.77 pad.3@83.55,129.95
  Bottom Layer w0.254: pad.3@121.55,129.95 122.01,129.95 127.908,124.051 v3(130.8,124.051)
MISO: U1.11 U6.2 U8.5 | length 50.7
  Top Layer w0.2: U8.5 103.46,125.35 103.46,105.81 97.387,99.737 v1(97.387,98.479)
  Mid-Layer 1 w0.2: v1(90.3,102.702) 90.3,102.262 v1(94.76,97.802)
  Bottom Layer w0.2: v1(90.3,102.702) U1.11 ; v1@94.76,97.801 94.793,97.834 96.33,97.834 96.743,97.835 v1(97.387,98.479)
MOSI: U1.10 U6.5 U7.19 U8.2 | length 52.3
  Top Layer w0.2: U8.2 90.049,133.259 94.398,133.259 95.15,132.507 95.15,117.901 95.15,117.05 U7.19 95.15,113.113 94.575,112.538 94,112.538 93.849,112.689 93.849,113.776 v1@94.197,114.124 ; v1(89.746,95.929) 89.746,100.406 v1(89.969,100.629)
  Mid-Layer 1 w0.2: v1(91.56,103.302) 91.56,103.402 94.196,106.038 v1@94.196,114.123
  Bottom Layer w0.2: U6.5 89.27,95.453 v1(89.746,95.929) ; v1(89.969,100.629) 91.098,101.758 91.098,103.73 ; U1.10@90.8,104.7 90.8,104.028 91.098,103.73 ; v1(91.56,103.302) 91.526,103.302 91.098,103.73
  other v1: 94.197,114.124
OLEDCS: U1.26 U7.13 | length 5
  Top Layer w0.2: v1(90.95,113.488) U7.13
  Bottom Layer w0.2: v1(90.95,113.488) 91.239,113.488 91.8,112.927 U1.26
OLEDD/C: U1.25 U7.15 | length 5
  Top Layer w0.2: v1@91.246,112.913 91.246,112.94 92.35,114.044 U7.15
  Bottom Layer w0.2: v1@91.246,112.913 91.3,112.859 U1.25
  other v1: 91.246,112.913
OLEDRES: U1.27 U7.14 | length 4.8
  Top Layer w0.2: U7.14 91.65,114.348 v1@91.868,114.13
  Mid-Layer 1 w0.2: v1@91.868,114.13 91.868,113.824 v1(92.288,113.404)
  Bottom Layer w0.2: v1(92.288,113.404) 92.3,113.392 U1.27
  other v1: 91.868,114.13
R4_2: C7.1 R4.2 | length 6.3
  Top Layer w0.2: v1(96.705,119.98) v1(98.455,118.23)
  Bottom Layer w0.2: R4.2 96.178,119.453 v1(96.705,119.98) ; v1(98.455,118.23) 98.685,118 C7.1
R8_2: R8.2 USB.A7 USB.B7 | length 12.5
  Bottom Layer w0.2: USB.B7 93.41,92.153 93.41,92.54 93.344,92.607 92.477,92.607 92.41,92.54 92.41,92.153 USB.A7 92.41,90.989 95.002,88.398 97.782,88.398 99.247,86.933 R8.2@99.247,86.3
R9_2: R9.2 USB.A6 USB.B6 | length 11.3
  Top Layer w0.2: v1(91.969,92.67) 93.313,91.326 v1@93.313,90.877
  Bottom Layer w0.2: USB.B6 91.91,92.611 v1(91.969,92.67) ; USB.A6 92.91,90.989 93.022,90.877 93.313,90.877 95.49,88.7 R9.2@99.247,88.7
  other v1: 93.313,90.877
R11_2: Q1.1 R11.2 | length 6
  Bottom Layer w0.2: R11.2 79.547,93.153 80.017,92.683 80.517,92.683 81.25,91.951 Q1.1
RX: U1.20 U6.1 | length 24.4
  Bottom Layer w0.2: U1.20 86.033,109.7 82.989,106.656 82.989,105.993 88.761,100.221 95.214,100.221 U6.1
SCK: U1.9 U6.6 U7.18 U8.4 | length 59.8
  Top Layer w0.2: v1(93.76,118.202) 94.148,118.202 94.45,117.9 ; U8.4 94.671,131.599 94.671,118.122 94.45,117.901 ; U7.18 94.45,117.05 94.45,117.901
  Mid-Layer 2 w0.2: v1(90.96,95.702) 92.06,96.802 v1(92.06,103.302) ; v1(92.06,103.302) 92.06,104.903 87.76,104.903 86.061,106.602 86.061,119.803 93.76,119.803 v1(93.76,118.202)
  Bottom Layer w0.2: U6.6 90.097,96.565 v1(90.96,95.702) ; U1.9 91.3,104.162 92.06,103.402 v1(92.06,103.302)
SW1_3: U10.3
SW1_4: U10.4
SW2_3: U9.3
SW2_4: U9.4
SW3_5: SW3.5
SW3_6: SW3.6
SW4_1: SW4.1
SW5_1: SW5.1
U1_6: C1.2 U1.6 | length 15.5
  Mid-Layer 1 w0.2: v1(93.36,103.402) 96.45,103.402 v1(98.382,105.334)
  Bottom Layer w0.2: U1.6@92.8,104.7 92.8,103.962 v1(93.36,103.402) ; v1(98.382,105.334) 99.384,105.334 103.999,109.95 C1.2
U1_16: C3.2 U1.16 X1.1 | length 34.4
  Mid-Layer 2 w0.2: v1(87.36,107.702) 100.76,107.702 v1(103.56,104.902)
  Bottom Layer w0.2: v1(87.36,107.702) U1.16@89.299,107.7 ; v1@103.559,104.903 103.607,104.949 C3.2@104.6,104.949 ; X1.1 104.565,94.6 104.976,94.6 104.976,95.401 105.125,95.55 106.321,95.55 106.727,95.956 106.727,103.143 105.97,103.9 105.65,103.9 105.201,104.349 105.201,104.95 104.901,104.95 C3.2
U1_17: C4.2 U1.17 X1.3 | length 30
  Mid-Layer 1 w0.2: v1(88.06,108.202) 88.06,106.202 91.949,102.314 v1(95.981,102.313)
  Bottom Layer w0.2: v1(88.06,108.202) 88.709,108.202 88.711,108.2 U1.17 ; v1(95.981,102.313) 99.341,98.954 105.299,98.954 ; C4.2 104.901,102.45 105.201,102.45 105.299,102.351 105.299,98.954 ; X1.3 105.925,97.701 105.299,98.327 105.299,98.954
U1_42: C5.1 U1.42 | length 11.5
  Bottom Layer w0.2: U1.42 96.999,106.7 97.98,105.719 97.98,105.168 103.448,99.7 103.999,99.7 C5.1
U2_4: U2.4
U2_6: U2.6
U3_1: C9.2 C10.2 F1.1 R2.1 R4.1 U3.1 | length 39.1
  Bottom Layer w0.2: R2.1 89.8,117.343 89.9,117.243 94.95,117.243 95.05,117.343 ; R4.1 95.05,117.343 ; U3.1@97.206,125.449 97.996,125.449 98.743,124.702 101.113,124.702 101.362,124.951 103.272,124.951 ; F1.1 103.459,126.05 103.272,125.863 103.272,124.952 103.272,121.914 C9.2@106.05,119.136 ; C10.2@106,114.7 105.399,114.7 105.399,116.974 105.263,117.111 ; C9.2 C9.2@106.05,119.136 ; 95.05,117.343 95.282,117.111 105.263,117.111 ; 105.263,117.111 105.263,118.613 105.449,118.799 106.05,118.799 106.05,119.1 C9.2@106.05,119.136
U3_2: L1.2 U3.2 | length 20.3
  Mid-Layer 1 w0.2: v1(83.959,127.444) 86.4,125.002 v1(97.86,125.002)
  Bottom Layer w0.2: L1.2 81.351,125.478 83.316,127.444 v1(83.959,127.444) ; U3.2 97.26,125.002 v1(97.86,125.002)
U3_4: L1.1 U3.4 | length 24.3
  Mid-Layer 1 w0.2: v1@83.5,126.94 83.5,124.662 84.161,124.001 v1@98.359,124.001
  Bottom Layer w0.2: L1.1 81.351,123.422 81.351,124.791 v1(83.5,126.941) ; U3.4 98.308,123.95 v1(98.36,124.002)
U3_5: D1.3 U3.5 | length 5.7
  Bottom Layer w0.2: U3.5@97.206,123.45 98.408,123.45 99.06,124.103 101.451,124.103 101.799,124.451 ; 101.799,124.45 D1.3
U3_10: C7.2 R2.2 R3.1 U3.10 | length 26.8
  Top Layer w0.2: v1@98.413,125.612 96.759,125.612 96.759,122.302 v1(98.76,122.302)
  Bottom Layer w0.2: R2.2 R3.1 92.55,118.849 92.749,118.651 100.151,118.651 100.3,118.799 C7.2 100.3,120.762 v1(98.76,122.302) ; U3.10 94.392,125.543 94.8,125.951 98.075,125.951 v1(98.413,125.612)
U5_5: R5.2 U5.5 | length 18.1
  Mid-Layer 1 w0.2: v1(91.018,121.855) v1(92.168,123.004)
  Bottom Layer w0.2: R5.2 81.657,114.95 81.87,115.162 85.513,115.162 88.684,118.333 88.684,119.521 v1(91.018,121.855) ; U5.5 91.25,124.875 92.168,123.957 v1(92.168,123.004)
U7_2: C13.1 U7.2 | length 14.6
  Top Layer w0.2: U7.2 83.25,113.389 v1@83.654,112.986
  Mid-Layer 1 w0.2: v1@80.968,103.689 80.968,110.3 v1@83.654,112.986
  Bottom Layer w0.2: v1@80.968,103.689 81,103.721 C13.1
  other v1: 80.968,103.689 83.654,112.986
U7_3: C13.2 U7.3 | length 13.6
  Top Layer w0.2: v1(83.908,113.911) 83.95,113.953 U7.3
  Mid-Layer 1 w0.2: v1(79.701,105.69) 79.701,109.704 v1(83.908,113.911)
  Bottom Layer w0.2: C13.2 79.6,105.589 v1(79.701,105.69)
U7_4: C14.1 U7.4 | length 16.2
  Top Layer w0.2: v1(82.287,110.455) 82.012,110.73 82.012,117.867 82.268,118.123 84.428,118.123 84.65,117.901 U7.4
  Bottom Layer w0.2: C14.1 81.601,107.2 82.287,107.886 v1(82.287,110.455)
U7_5: C14.2 U7.5 | length 11.9
  Top Layer w0.2: v1(80.124,108.286) 80.944,108.286 85.188,112.53 85.188,114.338 85.35,114.499 U7.5
  Bottom Layer w0.2: C14.2 79.6,107.851 79.689,107.851 v1(80.124,108.286)
U7_20: U7.20
U7_26: R10.2 U7.26 | length 32.1
  Top Layer w0.2: v1(81.622,103.111) 82.172,102.561 v1(82.172,101.381) ; U7.26 100.05,114.499 100.125,114.424 v1(100.125,114.375)
  Bottom Layer w0.2: R10.2 81.053,100.262 v1(82.172,101.381) ; v1(81.622,103.111) 81.622,106.699 89.455,114.532 99.968,114.532 v1(100.125,114.375)
U7_27: C12.2 U7.27 | length 29.8
  Top Layer w0.2: v1(100.75,114.39) 100.75,114.499 U7.27
  Bottom Layer w0.2: C12.2 81.601,101.7 82.038,102.138 82.038,106.687 89.245,113.895 91.535,113.895 91.702,113.728 92.034,113.728 92.201,113.895 93.858,113.895 94.031,113.722 94.364,113.722 94.536,113.895 100.254,113.895 v1(100.75,114.39)
U7_28: C16.2 U7.28 | length 24.4
  Top Layer w0.2: v1(85.59,113.67) 87.257,112.002 98.977,112.002 101.451,114.474 U7.28
  Bottom Layer w0.2: C16.2 84.37,112.45 v1(85.59,113.67)
U7_29: C15.1 U7.8 U7.29 | length 28.9
  Top Layer w0.2: v1(87.45,114.378) U7.8 ; v1(101.833,118.502) 102.15,118.185 U7.29@102.15,116.2
  Mid-Layer 1 w0.2: v1(87.45,114.378) 87.604,114.532 97.863,114.532 v1(101.833,118.502)
  Bottom Layer w0.2: C15.1 81.601,109.95 81.601,110.348 82.907,111.654 84.726,111.654 v1(87.45,114.378)
USB1_A5: USB.A5
USB1_A8: USB.A8
USB1_B5: USB.B5
USB1_B8: USB.B8
USBD+: R8.1 U1.4 | length 21.6
  Bottom Layer w0.2: U1.4@93.8,104.7 93.8,103.5 99.996,97.304 99.996,86.453 100.149,86.3 R8.1
USBD-: R9.1 U1.3 | length 18.7
  Bottom Layer w0.2: U1.3@94.3,104.7 94.3,103.427 100.753,96.974 R9.1
VBUS: C2.2 C11.2 D1.2 R6.2 R7.2 U1.2 U1.7 U5.4 USB.A4B9 USB.B4A9 | length 159.6
  Top Layer w0.3: v2(97.36,101.902) 97.36,102.402 v2(102.86,107.902)
  Mid-Layer 2 w0.3: v2(93.361,101.601) 97.059,101.601 v2(97.36,101.902)
  Bottom Layer w0.3: C11.2 83.253,119.4 R7.2 R6.2 79.55,117.193 78.555,116.198 78.555,90.679 78.905,90.329 81.784,90.329 81.944,90.49 81.944,92.04 81.12,92.864 81.12,93.204 81.631,93.715 89.235,93.715 90.26,92.69 ; U5.4 89.35,125.601 89.35,126.471 99.216,126.471 D1.2@100.286,125.4 ; U1.7@92.299,104.7 92.299,103.862 92.66,103.501 92.66,102.302 v2(93.361,101.601) ; U1.2 94.8,103.862 95.56,103.102 96.16,103.102 v2(97.36,101.902) ; USB.A4B9 95.06,92.565 94.405,93.22 90.79,93.22 90.26,92.69 ; D1.2 D1.2@100.286,125.4 ; v2(102.86,107.902) 104.148,107.903 C2.2 ; C2.2 105.401,106.649 105.845,106.649 106.216,106.279 ; 90.26,92.69 90.26,91.765 90.26,91.155 95.973,85.442 101.356,85.442 102.089,86.175 102.089,86.832 107.226,91.97 107.226,105.268 106.216,106.279 ; D1.2@100.286,125.4 100.95,125.4 102.687,127.136 102.73,127.136 102.737,127.143 106.674,127.143 107.388,126.43 107.388,107.45 106.216,106.279
VCC: C15.2 F1.2 Q1.3 R1.1 U1.14 U1.24 U1.34 U1.44 U6.3 U6.7 U6.8 U7.6 U7.9 U8.1 | length 132.9
  Top Layer w0.3: v2(79.299,111.503) 79.299,115.952 82.032,118.685 85.416,118.685 86.05,118.051 ; U7.6 86.05,117.125 86.05,118.051 ; U8.1 86.609,132.2 87.653,131.156 87.653,118.051 ; v2(90.16,113.002) 89.131,113.002 v2(88.863,112.734) 88.15,113.447 U7.9 88.15,117.125 88.15,118.051 87.653,118.051 ; v2(97.16,105.202) 99.76,107.802 99.76,109.402 v2(98.76,110.402) ; 86.05,118.051 87.653,118.051
  Mid-Layer 1 w0.3: v2(85.653,102.487) 85.653,109.524 v2(88.863,112.734)
  Mid-Layer 2 w0.3: v2@86.759,109.203 92.159,109.203 93.361,110.402 v2(98.76,110.402) ; v2(86.76,109.202) 86.76,109.602 v2(90.16,113.002)
  Bottom Layer w0.2: U1.44 96.663,105.701 v2(97.16,105.202)
  Bottom Layer w0.3: v2(79.299,111.503) 79.6,111.202 C15.2 ; Q1.3 80.3,94.571 82.388,94.571 85.653,97.835 ; v2(85.653,102.487) 85.653,97.835 ; v2(86.76,109.202) 86.76,107.002 87.062,106.7 U1.14 ; U6.8 U6.7 ; v2(90.16,113.002) 90.8,112.362 U1.24 ; U1.34@96.3,110.699 96.802,111.202 105.159,111.202 106.053,112.096 R1.1 ; U6.3 91.675,96.565 90.405,97.835 U6.7 ; 97.96,111.202 98.161,111.002 v2(98.76,110.402) ; F1.2 106.791,122.85 106.851,122.79 106.851,112.244 106.807,112.2 106.751,112.2 106.654,112.2 106.43,112.2 R1.1 ; 85.653,97.835 U6.7
VDD: C6.2 C8.2 D1.1 pad.1@80.301,131.7 pad.1@118.301,131.7 pad.1@143.301,131.7 SW4.3 U2.5 U3.3 U4.2 U5.3 | length 115.1
  Top Layer w0.254: SW4.3 v3(126.8,124.084)
  Top Layer w0.3: pad.1@80.3,131.7 80.3,125.629 v2(82.759,123.17)
  Mid-Layer 2 w0.3: v1@98.16,124.502 98.46,124.802 99.06,124.802 99.16,124.702 99.16,122.902 99.46,122.602 99.86,122.602 v1(99.96,122.702)
  Bottom Layer w0.254: pad.1@118.3,131.7 118.3,131.12 125.336,124.084 v3(126.8,124.084) 128.801,122.1 133.7,122.1 pad.1@143.299,131.699
  Bottom Layer w0.3: v2(82.759,123.17) 82.759,122.976 83.321,122.414 84.8,122.414 ; U2.5 84.8,123.249 84.8,122.705 84.8,122.414 ; C6.2 87.05,120.151 ; U5.3 89.35,122.555 89.35,122.43 ; 96.305,121.451 97.755,122.901 98.58,122.901 99.18,123.501 ; U3.3 98.108,124.45 v1@98.16,124.502 ; U4.2@97.55,119.453 97.55,120.207 96.305,121.452 94.59,121.452 93.612,122.43 89.35,122.43 ; 99.179,123.5 D1.1 ; v1(99.96,122.702) 100.065,122.807 D1.1 ; C8.2 103.3,120.151 100.95,122.5 100.95,123.5 100.508,123.5 D1.1 ; 84.8,122.414 86.046,121.168 86.046,120.709 86.605,120.151 87.05,120.151 ; 87.05,120.151 89.329,122.43 89.35,122.43
  other v1: 98.16,124.502
X1_2: X1.2
X1_4: X1.4
"": 
pads on no net: U1.8 U1.12 U1.18 U1.19 U1.21 U1.22 U1.29 U1.30 U1.32 U1.40 U1.41 U3.7

## Polygon pours and split planes (outlines as drawn)
GND on Bottom Layer (solid, remove dead copper): 77.4,134.6 145.6,134.6 146.8,133.4 146.8,84.2 147.2,83.8 76.5,83.8
GND on Top Layer (solid, remove dead copper, pour order 1): 76.9,134.8 145,134.8 148.1,131.7 148.1,83.3 147.5,82.7 77.6,82.7 76.2,84.1

## Silkscreen, mask and mechanical layers (free items; w line width, h text height)
Top Overlay:
  lines w0.254: 117.3,91.2 144.3,91.2 144.3,128.2 117.3,128.2 117.3,91.2
  text "CopyRight(C) LiLinBai 2022" at 124.61,137.354 h0.96
  text "Battery" at 118.728,107.443 h4.31
  text "Arduboy" at 87.057,107.308 h1.91
  text "380mAh 4*25*35" at 117.996,92.056 h1.91
  text "LiLin Bai" at 88.882,84.867 h1.2
  text "JLCJLCJLCJLCJLC" at 78.837,77.354 h0.96
  text "CopyRight(C) LiLinBai 2022" at 124.61,77.354 h0.96
Bottom Overlay:
  lines w0.254: 117.3,91.2 144.3,91.2 ; 117.3,91.2 117.3,94.8 144.3,94.8 144.3,91.2 ; 117.3,91.2 144.3,91.2 ; 117.3,91.2 117.3,128.2 144.3,128.2 144.3,91.2 ; 117.3,117.4 144.3,117.4 144.3,120.4 117.3,120.4 117.3,117.4
  text "POWER" at 102.017,129.504 h0.96
  text "Public class Helloworld {" at 144.426,126.658 h1.28
  text "Public static void main(String[ ] args){" at 143.16,125.558 h1.28
  text "// Print\"Hello,World\"in the tewminal window" at 141.187,124.558 h1.28
  text "System.out.println(“Hello,World”);" at 140.906,123.258 h1.28
  text "}" at 141.392,122.258 h1.28
  text "}" at 143.51,120.958 h1.28
  text "Hello,World!" at 141.893,117.91 h1.94
  text "Desigh By LiLinBai In China" at 140.145,93.165 h1.15
  text "Power With The C Programming Language" at 140.916,91.743 h0.77
  text "CopyRight(C) LiLinBai 2022" at 138.894,84.854 h0.96
Mechanical 1:
  drawing of 175 lines, arcs and shapes, not listed
Mechanical 6:
  text "行距：2mm" at 78.221,151.823 h2.34
  text "列距：8mm" at 78.321,148.723 h2.34
  text "数量：2 x 1" at 78.533,145.823 h2.34
  text "备注：只拼接边框，所有PCB板厂支持该拼版方式" at 80.325,142.823 h2.34

## Text inside footprints (layer, text, board x,y; h text height)
BUZZER1: Bottom Overlay "+" at 94.324,129.883 h0.95; Bottom Overlay "-" at 92.038,129.883 h0.95